# Altium PCB TWIST_SWITCHv1.1.PcbDoc
Units mm, origin at the board's own origin, x right, y up, seen from the top; angles counter-clockwise.
Board outline 30 x 10 mm, 4 copper layers (TL, S1, S2, BL), stack 1.544 mm thick; 11 components, 5 nets, 15 pads, 2 vias.
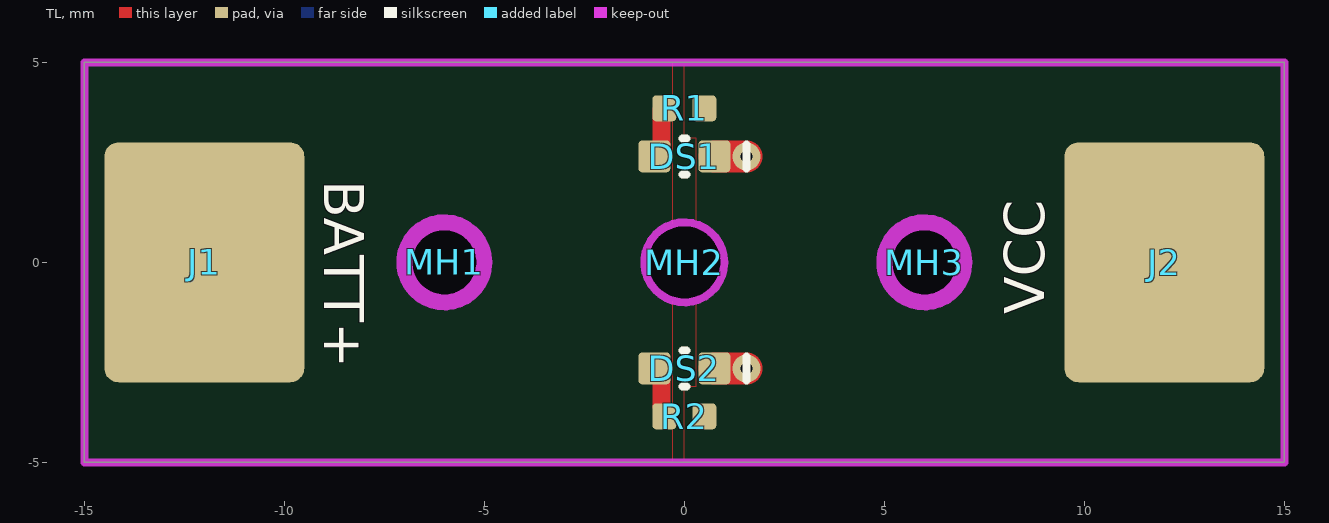
[diagram p0: TL view]
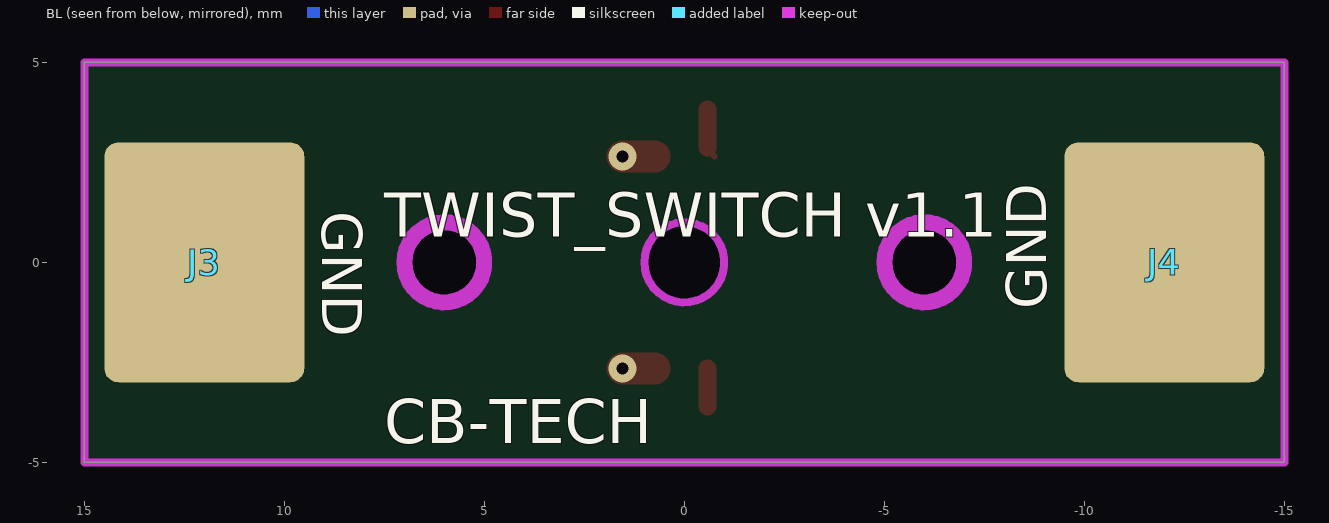
[diagram p1: BL view, seen from below]
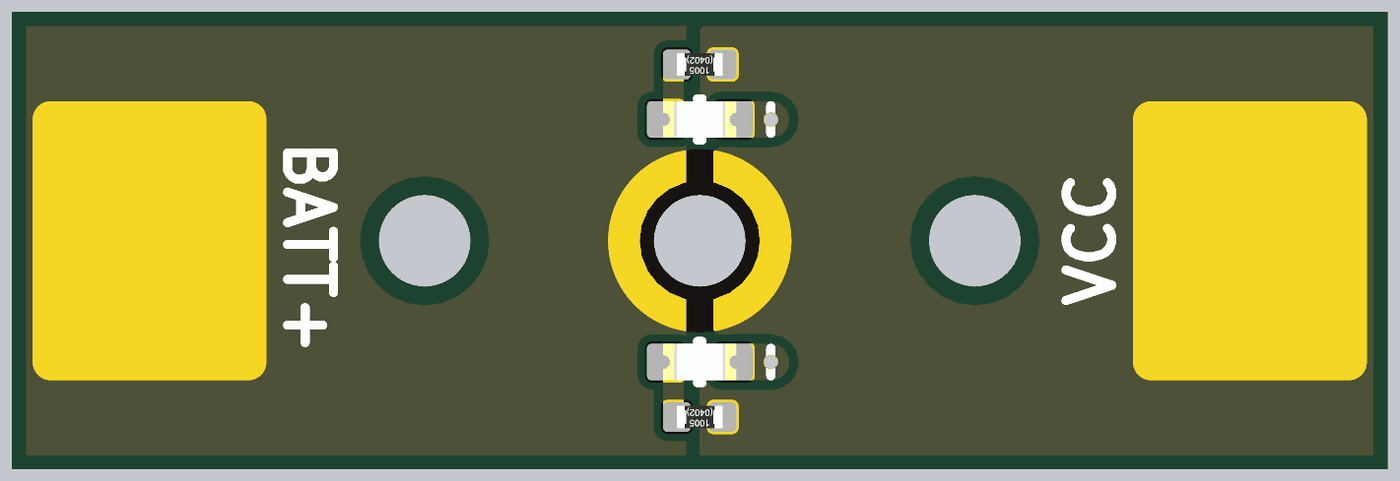
[diagram p2: 3D render of the assembled board from above, using the file's embedded part models]

## Layer stack, top to bottom
Top Solder: solder mask 0.01, Solder Resist, Dk 3.5
TL: signal copper 0.036
Dielectric1: core 0.3, FR-4, Dk 4.2
S1: signal copper 0.036
Dielectric 2: prepreg 0.8, FR-4, Dk 4.2
S2: signal copper 0.036
Dielectric 3: core 0.3, FR-4, Dk 4.2
BL: signal copper 0.036
Bottom Solder: solder mask 0.01, Solder Resist, Dk 3.5

## Board outline
-15,-5 -15,5 15,5 15,-5

## Design rules (kind name [scope] priority, off if disabled: settings)
AssemblyTestPointUsage [All] p1: valid=2
AssemblyTestpoint [All] p1: testpointundercomponent=FALSE minsize=1 maxsize=2.5 preferedsize=1.5 minholesize=0 maxholesize=1 preferedholesize=0.8 testpointgrid=0.1 usegrid=TRUE gridoriginx=100 gridoriginy=80 gridtolerance=0 allowsidebottom=TRUE minspacing=3
BoardOutlineClearance [All] p1: gap=0.2 ignorepadtopadclearanceinfootprint=FALSE except(0: Arc-SplitContinuation Track-SplitContinuation SMDPad-SplitContinuation THPad-SplitContinuation Via-SplitContinuation Fill-SplitContinuation Poly-SplitContinuation Region-SplitContinuation Text-SplitContinuation)
Clearance Clearance_Poly [InPoly] p1: gap=0.2 ignorepadtopadclearanceinfootprint=FALSE
Clearance [All] p2: gap=0.2 ignorepadtopadclearanceinfootprint=TRUE except(0.28: Via-Via; 0.3: Arc-Via Track-Via; 0.35: Arc-THPad Arc-Hole Track-THPad Track-Hole SMDPad-THPad SMDPad-Hole THPad-Hole Via-Hole Fill-Hole Poly-Hole Region-Hole Text-Hole; 0.5: THPad-THPad)
ComponentClearance [All] p1: gap=0.25 collisioncheckmode=3 verticalgap=0.25 showdistances=TRUE
DiffPairsRouting [All] p1: maxlimit=10 minlimit=0.15 mostfreqgap=0.2 toplayer_minwidth=0.15 toplayer_maxwidth=0.5 toplayer_prefwidth=0.2 midlayer1_minwidth=0.15 midlayer1_maxwidth=0.5 midlayer1_prefwidth=0.2 midlayer2_minwidth=0.15 midlayer2_maxwidth=0.5 midlayer2_prefwidth=0.2 bottomlayer_minwidth=0.15 bottomlayer_maxwidth=0.5 bottomlayer_prefwidth=0.2 maxuncoupledlength=5
FabricationTestPointUsage TestPointUsage [All] p1: valid=0 allowmultiple=FALSE
FabricationTestpoint Testpoint [All] p1: side=1 testpointundercomponent=TRUE minsize=0.3 maxsize=10 preferedsize=1.5 minholesize=0 maxholesize=10 preferedholesize=0.8 testpointgrid=0.025 allowsidetop=TRUE usegrid=FALSE gridtolerance=0
Height [All] p1: minheight=0 maxheight=100 prefheight=5
HoleSize HoleSize_Via [IsVia] p1: absolutevalues=TRUE maxlimit=5 minlimit=0.25 maxpercent=80.000 minpercent=20.000
HoleSize [All] p2: absolutevalues=TRUE maxlimit=6 minlimit=0.2 maxpercent=80.000 minpercent=20.000
HoleToHoleClearance HoleToHoleClearance_Via [IsVia] p1: gap=0.3 allowstackedmicrovias=TRUE
HoleToHoleClearance [All] p2: gap=0.5 allowstackedmicrovias=TRUE
MinimumAnnularRing MinimumAnnularRing_Via [IsVia] p1: minimumring=0.15
MinimumAnnularRing [All] p2: minimumring=0.2
MinimumSolderMaskSliver [All] p1: minsoldermaskwidth=0.1
PlaneClearance [All] p1: clearance=0.2
PlaneConnect PlaneConnect_Via [isVia] p1: planeconnectstyle=Direct reliefexpansion=0.508 reliefentries=4 reliefconductorwidth=0.254 reliefairgap=0.254
PlaneConnect [All] p2: planeconnectstyle=Direct reliefexpansion=0.3 reliefentries=4 reliefconductorwidth=0.3 reliefairgap=0.2
PolygonConnect PolygonConnect_Via [isVia] p1: connectstyle=Direct reliefconductorwidth=0.254 reliefentries=4 polygonreliefangle="90 Angle" airgapwidth=0.254
PolygonConnect [All] p2: connectstyle=Direct reliefconductorwidth=0.3 reliefentries=4 polygonreliefangle="90 Angle" airgapwidth=0.2
RoutingCorners [All] p1: cornerstyle=45-Degree minsetback=3 maxsetback=3
RoutingVias [All] p1: holewidth=0.3 width=0.6 viastyle="Through Hole" minholewidth=0.2 minwidth=0.5 maxholewidth=0.5 maxwidth=0.9
SMDEntry [All] p1: side=TRUE corner=TRUE anyangle=FALSE
SilkToSilkClearance [All] p1: silktosilkclearance=0.1
SilkToSolderMaskClearance SilkscreenOverComponentPads [InPadClass('All Pads')] p1: minsilkscreentomaskgap=0.1 clearancetoexposedcopper=FALSE
SolderMaskExpansion [All] p1: expansion=0.05 istentingtop=FALSE
Width [All] p1: maxlimit=5 minlimit=0.15 preferedwidth=0.2
15 further rules are at their usual default settings.

## Components (designator, comment, footprint, x,y, rotation, side; value= is the part's Value field where it differs from the comment)
DS1 "SML-LX0603GW-TR" LED_SML-LX0603 0,2.65 r180 top
DS2 "SML-LX0603GW-TR" LED_SML-LX0603 0,-2.65 r180 top
J1 "12X6mm SMD PAD" PAD-SM_12x6MM -12,0 r90 top
J2 "12X6mm SMD PAD" PAD-SM_12x6MM 12,0 r90 top
J3 "12X6mm SMD PAD" PAD-SM_12x6MM 12,0 r90 bottom
J4 "12X6mm SMD PAD" PAD-SM_12x6MM -12,0 r90 bottom
MH1 "3mm Non-Plated Hole" MTG310X600 -6,0 r0 top
MH2 "3mm Non-Plated Hole" MTG310X600 0,0 r0 top
MH3 "3mm Non-Plated Hole" MTG310X600 6,0 r0 top
R1 "1K,1%" RESC1005X04N_0402 0,3.85 r180 top
R2 "1K,1%" RESC1005X04N_0402 0,-3.85 r180 top

## Footprints (in the part's own frame and the unit in brackets; to place one, negate y for a bottom-side part, rotate by r counter-clockwise, add the part's x,y. Pads: shape width x height; smd on the part's side, far side on the other; paste and mask are expansions set on the pad)
LED_SML-LX0603 [mm] "Chip led, 2-Leads, Body 1.6x0.8mm, IPC Medium Density"
  rrect25% 0.8x0.8 smd: 1(-0.75,0) 2(0.75,0)
  silkscreen extent -1.55,-0.45 0.05,0.45, body extent -0.8,-0.4 0.8,0.4, height 0.63
MTG310X600 [mm]
  round 0 hole 2 unplated: ""(0,0)
PAD-SM_12x6MM [mm]
  rrect14% 6x5 smd paste-5 mask+0.05: 1(0,0)
RESC1005X04N_0402 [mm] "Chip Resistor, 2-Leads, Body 1.0x0.5mm, IPC Medium Density"
  rrect33% 0.6x0.65 smd mask+0.05: 1(-0.5,0) 2(0.5,0)
  body extent -0.5,-0.25 0.5,0.25, height 0.35

## Part data
DS1 DS2: library part LED-10011-A, "LED 565NM GRN DIFF 0603 SMD", Colour=Green, Manufacturer="Lumex Opto/Components Inc", Supplier Part Number 1=67-1549-1-ND, Axial Intensity=18mcd, BWA PN=LED-10011-A, Display_Name=SML-LX0603GW-TR, If(max)=25mA, Lens Style/Size="Rectangle, 1mmx0.8mm", Lens type="Diffused, White", Manufacturer Part Number=SML-LX0603GW-TR, Schematic Symbol=LED_1, Supplier 1=Digi-Key, Vf@I=2.2V, Viewing Angle=160deg, Vr(max)=5V, Wavelength=565nm
J1 J2 J3 J4: library part NONPART-025, BWA PN=NONPART-025, Display_Name="12X6mm SMD PAD", Schematic Symbol=SMD_PAD
MH1 MH2 MH3: library part NONPART-005, BWA PN=NONPART-005, Display_Name="3mm Non-Plated Hole", Schematic Symbol=HOLE_UNPLATED
R1 R2: library part RSG-1K000-D, "RES 1K 1/16W 1% 0402", Manufacturer=Yageo, Manufacturer Part Number=RC0402FR-071KL, Power=0.0625W, Resistance=1K, Supplier Part Number 1=311-1.00KLRCT-ND, Tolerance=1%, BWA PN=RSG-1K000-D, Display_Name=1K,1%, Schematic Symbol=RESISTOR_1, Supplier 1=Digi-Key, Type=Chip

## Via types
v1: diameter 0.7, hole 0.3, TL to BL, tented both sides, 2 vias

## Nets (pads, with @x,y where several pads share a name; then routed paths per layer and width w, separated by ;. In a path a pad name is that pad's centre, name@x,y a point inside that pad or via, vN(x,y) a via of type N, cw(c..) or ccw(c..) an arc to the next point about the centre after c; other vN are vias at no path point)
BATT: J1.1
GND: DS1.1 DS2.1 J3.1 J4.1 | length 1.6
  TL w0.8: DS2.1 v1(1.55,-2.65) ; DS1.1 v1(1.55,2.65)
NetDS1_2: DS1.2 R1.2 | length 1.3
  TL w0.152: DS1.2 DS1.2@-0.525,2.875 ; R1.2@-0.525,3.825 R1.2
  TL w0.45: DS1.2@-0.575,2.875 R1.2@-0.575,3.825
NetDS2_2: DS2.2 R2.2 | length 0.9
  TL w0.45: R2.2@-0.575,-3.6 DS2.2@-0.575,-2.65
VCC: J2.1 R1.1 R2.1
pads on no net: MH1. MH2. MH3.

## Polygon pours and split planes (outlines as drawn)
GND on BL "NONET_L-01_P-001" (solid, remove dead copper, shelved, pour order 0): -15,5 15,5 15,-5 -15,-5
BATT on TL "NONET_L-01_P-001" (solid, remove dead copper, shelved, pour order 1): -0.3,5 -0.3,-5 -15,-5 -15,5
VCC on TL "NONET_L-01_P-001" (solid, remove dead copper, shelved, pour order 2): 0.3,3.1 0.002,3.1 0,5 0.3,5 12.5,5 15,5 15,-5 0,-5 0,-3.1 0.3,-3.1

## Keep-outs
Keep-Out Layer:
  circle w0.4: c6,0 r1
  circle w0.4: c-6,0 r1
  circle w0.2: c0,0 r1
  lines w0.2: -15,-5 15,-5 15,5 -15,5 -15,-5

## Silkscreen, mask and mechanical layers (free items; w line width, h text height)
Top Overlay:
  text "BATT+" at -9,2.057 h1 r270
  text "VCC" at 9,-1.3 h1 r90
Bottom Overlay:
  text "GND" at 9.05,1.276 h1 r90
  text "TWIST_SWITCH v1.1" at 7.5,0.64 h1.1
  text "GND" at -9.05,-1.176 h1 r270
  text "CB-TECH" at 7.5,-4.523 h1.1
Top Solder:
  circle w2: c0,0 r1
Sheet Format, Top:
  drawing of 1131 lines, arcs and shapes, not listed
  text "1" at -65.417,188.935 h1.85
  text "2" at -15.833,188.935 h1.85
  text "3" at 34.167,188.935 h1.85
  text "4" at 84.167,188.935 h1.85
  text "5" at 134.167,188.935 h1.85
  text "6" at 184.167,188.935 h1.85
  text "7" at 234.167,188.935 h1.85
  text "8" at 284.167,188.935 h1.85
  text "A" at -93.333,172.935 h1.85
  text "A" at 311.667,172.935 h1.85
  text "B" at -93.333,122.935 h1.85
  text "B" at 311.667,122.935 h1.85
  text "C" at -93.333,72.935 h1.85
  text "C" at 311.667,72.935 h1.85
  text "D" at -93.333,22.935 h1.85
  text "D" at 311.667,22.935 h1.85
  text "Layer" at 198.83,-17.75 h1.5
  text "Name" at 208.978,-17.75 h1.5
  text "Material" at 232.122,-17.75 h1.5
  text "Thickness" at 253.516,-17.75 h1.5
  text "Constant" at 269.662,-17.75 h1.5
  text "Board Layer Stack" at 283.808,-17.75 h1.5
  text "Top Overlay" at 208.978,-20.75 h1.5
  text "Top Solder" at 208.978,-23.75 h1.5
  text "Solder Resist" at 232.122,-23.75 h1.5
  text "0.010mm" at 253.516,-23.75 h1.5
  text "3.5" at 269.662,-23.75 h1.5
  text "FABRICATION NOTES: (UNLESS OTHERWISE SPECIFIED)" at -75.511,-25.523 h3
  text "1" at 198.83,-26.75 h1.5
  text "TL" at 208.978,-26.75 h1.5
  text "0.036mm" at 253.516,-26.75 h1.5
  text "E" at -93.333,-27.065 h1.85
  text "E" at 311.667,-27.065 h1.85
  text "Dielectric1" at 208.978,-29.75 h1.5
  text "FR-4" at 232.122,-29.75 h1.5
  text "0.300mm" at 253.516,-29.75 h1.5
  text "4.2" at 269.662,-29.75 h1.5
  text "1. MANUFACTURE PER IPC-6010." at -72.438,-30.349 h2.5
  text "2" at 198.83,-32.75 h1.5
  text "S1" at 208.978,-32.75 h1.5
  text "0.036mm" at 253.516,-32.75 h1.5
  text "2. MATERIAL: GLASS EPOXY NEMA GRADE FR4" at -72.615,-33.499 h2.5
  text "Dielectric 2" at 208.978,-35.75 h1.5
  text "FR-4" at 232.122,-35.75 h1.5
  text "0.800mm" at 253.516,-35.75 h1.5
  text "4.2" at 269.662,-35.75 h1.5
  text "3. BALANCE CONSTRUCTION: X-LAYER BOARD WITH 36uM COPPER ON ALL LAYERS" at -72.615,-36.623 h2.5
  text "3" at 198.83,-38.75 h1.5
  text "S2" at 208.978,-38.75 h1.5
  text "0.036mm" at 253.516,-38.75 h1.5
  text "4. SOLDER MASK: LPI TYPE GREEN IN COLOR OVER BARE COPPER PER IPC-SM-840 CLASS 2 BOTH SIDES" at -72.742,-39.417 h2.5
  text "Dielectric 3" at 208.978,-41.75 h1.5
  text "FR-4" at 232.122,-41.75 h1.5
  text "0.300mm" at 253.516,-41.75 h1.5
  text "4.2" at 269.662,-41.75 h1.5
  text "5. BOARD DIMENSION ARE IN MM" at -72.615,-42.084 h2.5
  text "6. SILKSCREEN TO BE APPLIED USING A NON-CONDUCTIVE WHITE EPOXY INK." at -72.615,-44.751 h2.5
  text "4" at 198.83,-44.75 h1.5
  text "BL" at 208.978,-44.75 h1.5
  text "0.036mm" at 253.516,-44.75 h1.5
  text "7. MINIMUM FINISHED TRACE WIDTH: 0.2MM" at -72.615,-47.672 h2.5
  text "Bottom Solder" at 208.978,-47.75 h1.5
  text "Solder Resist" at 232.122,-47.75 h1.5
  text "0.010mm" at 253.516,-47.75 h1.5
  text "3.5" at 269.662,-47.75 h1.5
  text "8. MINIMUM FINISHED LINE SPACING: 0.2MM" at -72.742,-50.466 h2.5
  text "Bottom Overlay" at 208.978,-50.75 h1.5
  text "9. FINISH: IMMERSION GOLD" at -72.869,-53.133 h2.5
  text "Total board thickness:" at 198.83,-53.75 h1.5
  text "1.564mm" at 253.516,-53.75 h1.5
  text "PCB THICKNESS: 1.60MM" at -61.947,-56.054 h2.5
  text ".VariantName" at 252.85,-57.614 h2.54
  text "Project" at 191.89,-57.812 h2.54
  text "Variant" at 245.23,-57.812 h2.54
  text ".Project_Description" at 200.78,-58.686 h3.5
  text "10. DATA NOT ETCHED COMPENSATED" at -73.504,-59.61 h2.5
  text "11. THRU-HOLE TOLERANCE:" at -73.631,-62.785 h2.5
  text ".Project_Revision" at 252.85,-63.964 h2.54
  text "Sheet" at 191.89,-64.162 h2.54
  text "Revision" at 245.23,-64.162 h2.54
  text ".Printout_Name" at 200.78,-65.036 h3.5
  text "NPT HOLE TOL.: ±0.050MM" at -69.694,-65.706 h2.5
  text "PTH HOLE TOL.: ±0.075MM" at -69.694,-68.5 h2.5
  text "Design" at 191.89,-69.242 h2.54
  text ".Project_DesignBy" at 203.32,-69.242 h2.54
  text "Checking" at 229.99,-69.242 h2.54
  text ".Project_CheckingBy" at 241.42,-69.242 h2.54
  text "Drafting" at 191.89,-71.782 h2.54
  text ".Project_DraftingBy" at 203.32,-71.782 h2.54
  text "Components" at 229.99,-71.782 h2.54
  text ".Project_ComponentsBy" at 241.42,-71.782 h2.54
  text "Layout" at 191.89,-74.322 h2.54
  text ".Project_LayoutBy" at 203.32,-74.322 h2.54
  text ".Project_Address1" at 269.36,-74.322 h2.54
  text ".Project_Phone" at 292.059,-74.35 h2.54
  text ".Project_Address2" at 269.36,-76.862 h2.54
  text ".Project_Fax" at 292.059,-76.925 h2.54
  text "F" at -93.333,-77.065 h1.85
  text "F" at 311.667,-77.065 h1.85
  text "A3" at 241.42,-77.934 h2.54
  text "Routing" at 191.89,-78.132 h2.54
  text "MECHANICAL LAYER 2" at 203.32,-78.132 h2.54
  text "Size" at 229.99,-78.132 h2.54
  text ".Project_Address3" at 269.36,-79.402 h2.54
  text ".Project_Address4" at 269.36,-81.942 h2.54
  text "Date" at 191.89,-83.212 h2.54
  text ".Print_Date" at 203.32,-83.212 h2.54
  text "Time" at 229.99,-83.212 h2.54
  text ".Print_Time" at 241.42,-83.212 h2.54
  text ".Project_Address5" at 269.36,-84.482 h2.54
  text ".Project_URL" at 269.36,-87.022 h2.54
  text "File" at 191.89,-88.292 h2.54
  text ".Pcb_File_Name" at 203.32,-88.292 h2.54
  text "1" at -65.417,-93.065 h1.85
  text "2" at -15.833,-93.065 h1.85
  text "3" at 34.167,-93.065 h1.85
  text "4" at 84.167,-93.065 h1.85
  text "5" at 134.167,-93.065 h1.85
  text "6" at 184.167,-93.065 h1.85
  text "7" at 234.167,-93.065 h1.85
  text "8" at 284.167,-93.065 h1.85
Mech Outline:
  the board outline again, w0.2